# Altium PCB CSP_old.PcbDoc
Units mm, origin at the board's own origin, x right, y up, seen from the top; angles counter-clockwise.
Board outline 41.66 x 28.96 mm, 2 copper layers (Top Layer, Bottom Layer); 36 components, 22 nets, 80 pads, 0 vias.
Unrouted connection lines stored in the file: 1.
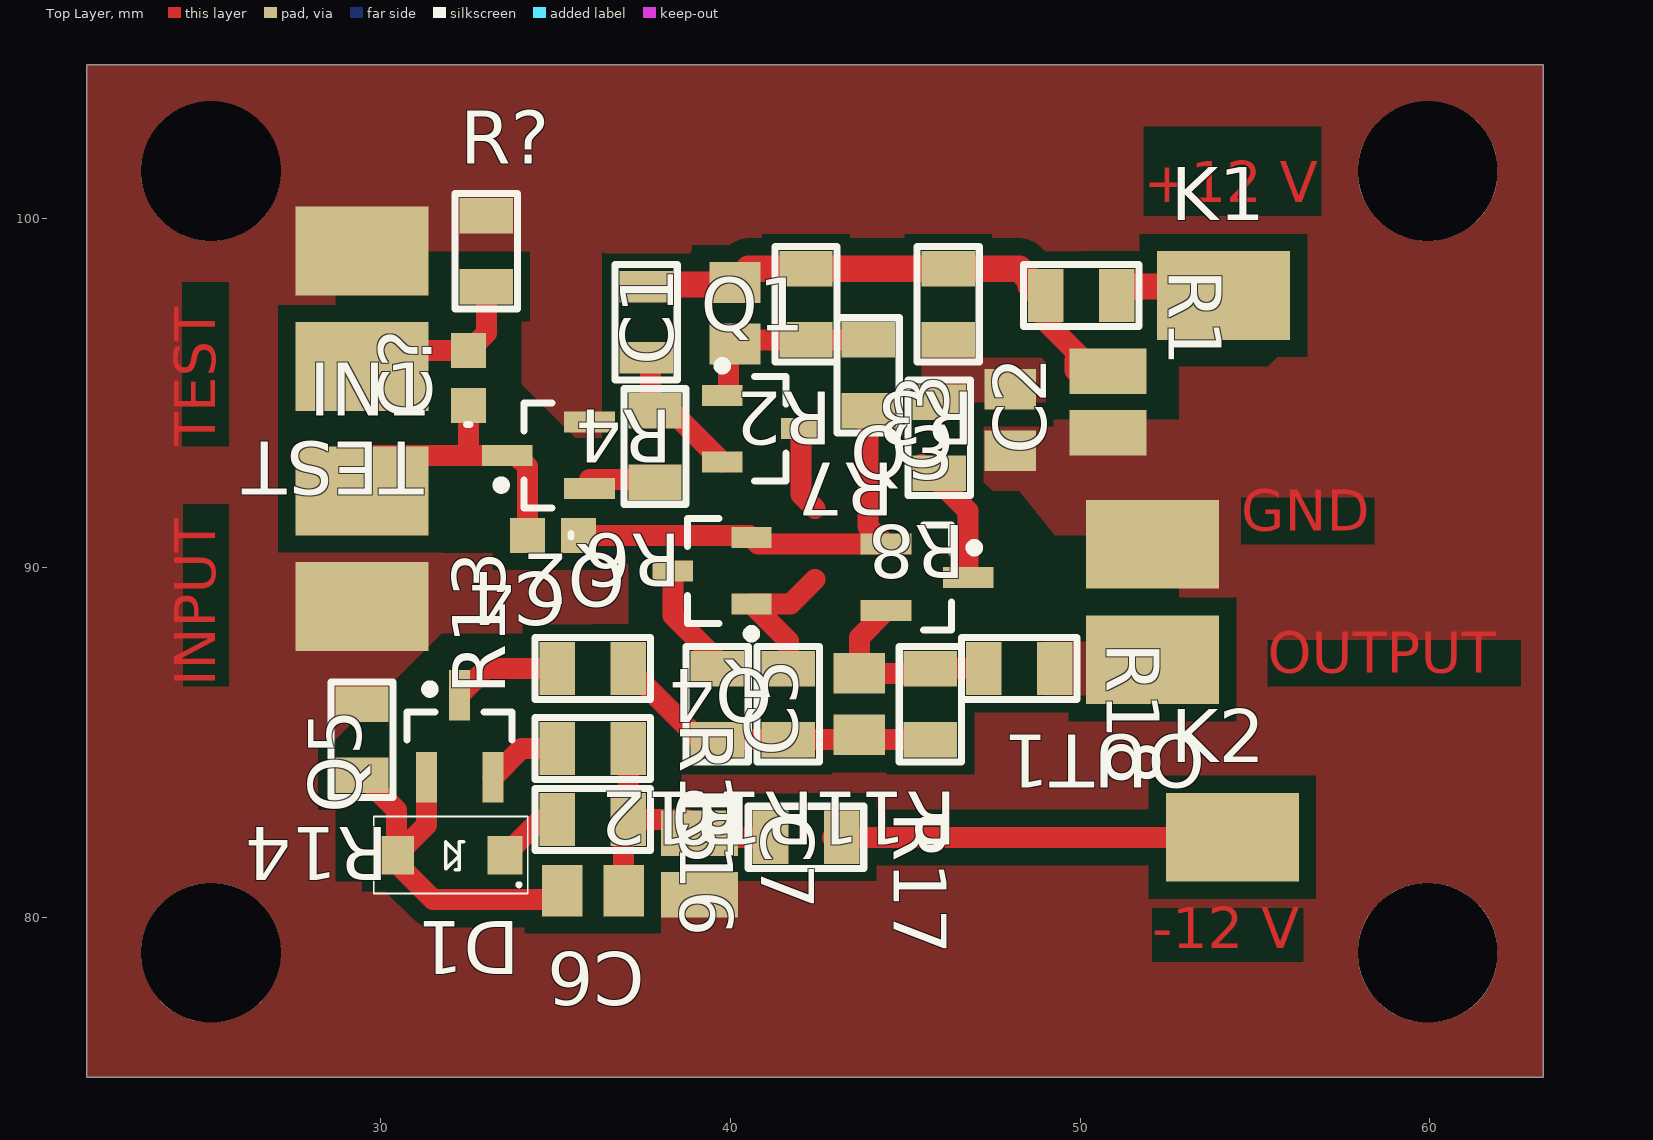
[diagram p0: Top Layer view]
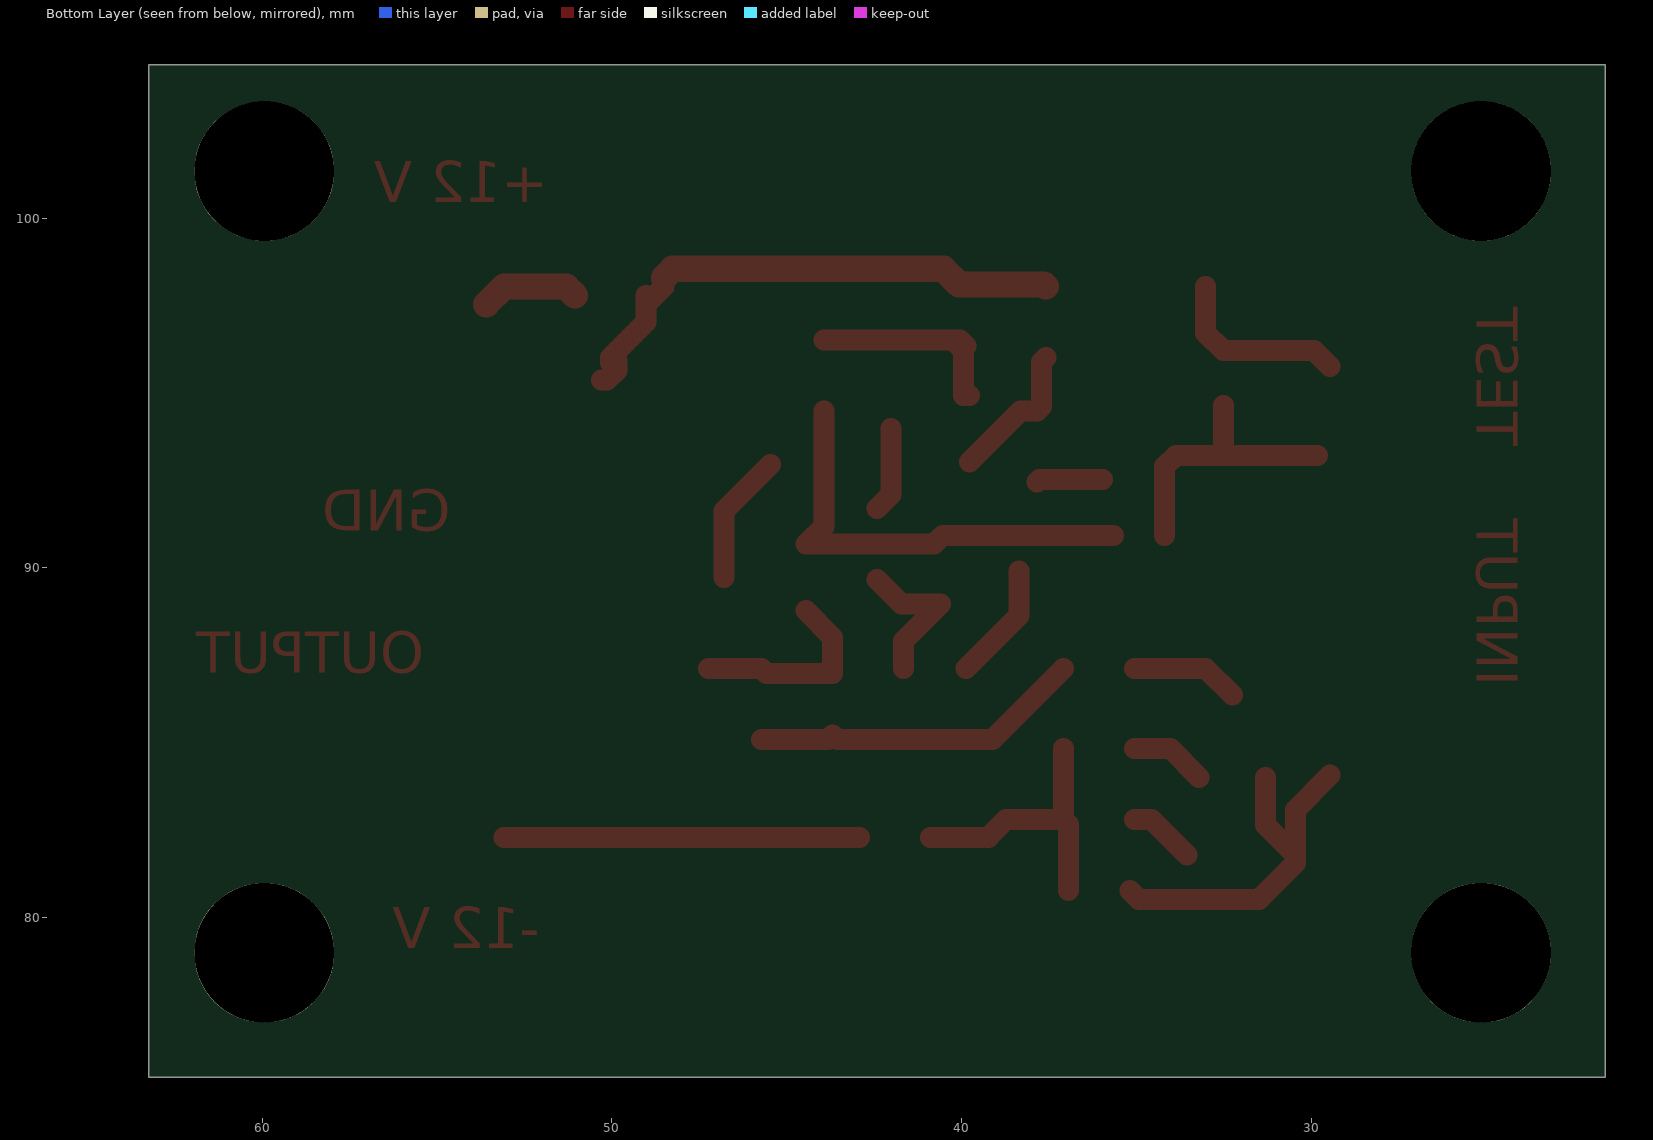
[diagram p1: Bottom Layer view, seen from below]
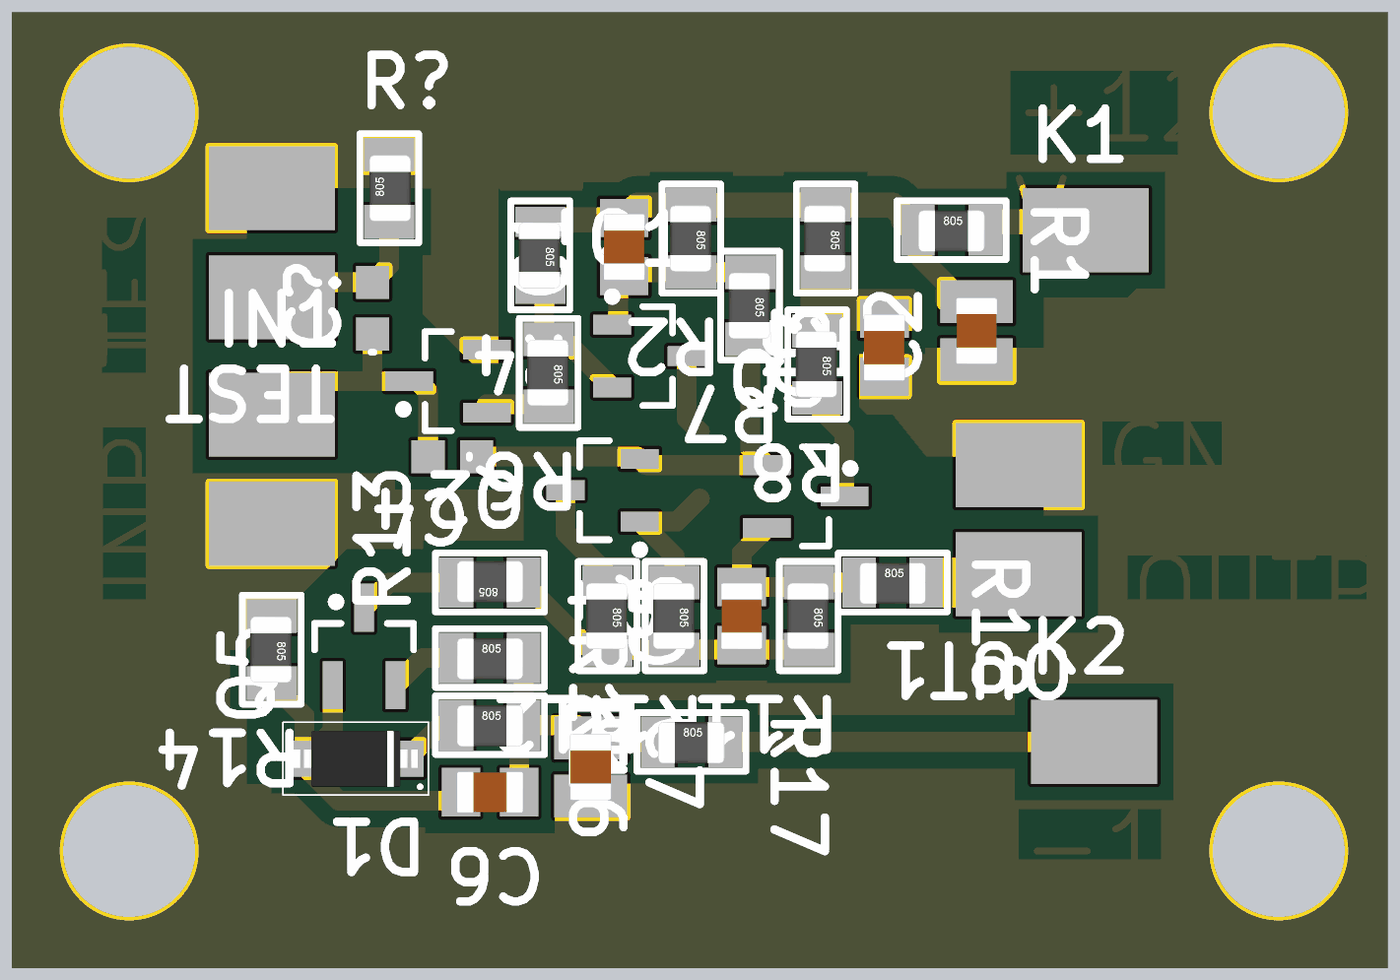
[diagram p2: 3D render of the assembled board from above, using the file's embedded part models]

## Layer stack, top to bottom
Top Solder: solder mask 0.0102, Solder Resist, Dk 3.5
Top Layer: signal copper 0.0356
Dielectric 1: dielectric 0.32, FR-4, Dk 4.8
Bottom Layer: signal copper 0.0356
Bottom Solder: solder mask 0.0102, Solder Resist, Dk 3.5

## Board outline
21.59,75.438 63.246,75.438 63.246,104.394 21.59,104.394

## Design rules (kind name [scope] priority, off if disabled: settings)
Clearance [All] p1: gap=0.254 ignorepadtopadclearanceinfootprint=FALSE except(0: Arc-Hole Track-Hole SMDPad-Hole THPad-Hole Via-Hole Fill-Hole Poly-Text Poly-Hole Region-Hole Text-Hole; 0.3: Arc-Arc Arc-Track Arc-SMDPad Arc-THPad Arc-Via Arc-Fill Arc-Poly Arc-Region Arc-Text Track-Track Track-SMDPad Track-THPad Track-Via Track-Fill Track-Region Track-Text; 0.5: Track-Poly SMDPad-Poly)
PlaneConnect [All] p1: planeconnectstyle=Direct reliefexpansion=0.508 reliefentries=4 reliefconductorwidth=0.254 reliefairgap=0.254
PolygonConnect [All] p1: connectstyle=Direct reliefconductorwidth=0.254 reliefentries=4 polygonreliefangle="90 Angle" airgapwidth=0.254
RoutingVias [All] p1: holewidth=0.711 width=1.27 viastyle="Through Hole" minholewidth=0.711 minwidth=1.27 maxholewidth=0.711 maxwidth=1.27
SolderMaskExpansion [All] p1: expansion=0.102 istentingtop=FALSE
Width [All] p1: maxlimit=1 minlimit=0.254 preferedwidth=0.6 toplayer_minwidth=0.5 bottomlayer_maxwidth=0.254 bottomlayer_prefwidth=0.254 minimp=50.000000 maximp=50.000000 favimp=50.000000
29 further rules are at their usual default settings.

## Components (designator, comment, footprint, x,y, rotation, side; value= is the part's Value field where it differs from the comment)
C1 "Cap" *CAPC2012X94N#1 40.132,97.282 r90 top value=1uF
C2 "Cap" *CAPC2012X94N#2 50.8,94.742 r90 top value=0.1uF
C3 "Cap" *CAPC2012X94N#1 48.006,94.234 r90 top value=0.1uF
C4 "Cap" 0603#1 34.544,90.932 r180 top value=0.3pF
C5 "Cap" *CAPC2012X94N#1 43.688,86.106 r90 top value=0.1uF
C6 "Cap" *CAPC2012X94N#1 36.068,80.772 r180 top value=0.01uF
C7 "Cap" *CAPC2012X94N#2 39.116,81.534 r270 top value=0.1uF
C? "Cap" 0603#2 32.512,94.996 r90 top value=0.3pF
D1 "Diode" SODFL350X110-2N 32.004,81.788 r180 top
IN1 "INPUT" IN/OUT 29.464,92.202 r0 top
K1 "+12V" PAD 54.102,97.79 r0 top
K2 "-12V" PAD 54.356,82.296 r0 top
OUT1 "OUTPUT" IN/OUT 52.07,87.376 r180 top
Q1 "PNP" SOT-23B_N 40.894,93.98 r0 top
Q2 "JFET-N" SOT23_M 34.798,93.218 r180 top
Q3 "2N3904 NPN" SOT23_M 45.625,89.728 r0 top
Q4 "2N3906 PNP" SOT-23B_N 39.479,89.916 r180 top
Q5 "2N3904 NPN" SOT23_M 32.258,85.185 r90 top
R1 "Res1" SMD-0805-RES#1 50.038,97.79 r270 top value=51
R2 "Res1" SMD-0805-RES#1 42.164,97.536 r180 top value=4.3K
R3 "Res1" SMD-0805-RES#1 46.228,97.536 r180 top value=33
R4 "Res1" SMD-0805-RES#2 37.592,97.028 r180 top value=820
R6 "Res1" SMD-0805-RES#1 37.846,93.472 r180 top value=33
R7 "Res1" SMD-0805-RES#1 43.942,95.504 r180 top value=3K
R8 "Res1" SMD-0805-RES#1 45.974,93.726 r180 top value=33
R10 "Res1" SMD-0805-RES#1 41.656,86.106 r180 top value=15k
R11 "Res1" SMD-0805-RES#1 45.72,86.106 r180 top value=500
R12 "Res1" SMD-0805-RES#1 39.624,86.106 r180 top value=33
R13 "Res1" SMD-0805-RES#1 36.068,87.122 r90 top value=33
R14 "Res1" SMD-0805-RES#1 29.464,85.09 r180 top value=10K
R15 "Res1" SMD-0805-RES#1 36.068,84.836 r270 top value=100
R16 "Res1" SMD-0805-RES#1 36.068,82.804 r270 top value=1.4k
R17 "Res1" SMD-0805-RES#1 42.164,82.296 r270 top value=51
R18 "Res1" SMD-0805-RES#1 48.26,87.122 r270 top value=51
R? "Res1" SMD-0805-RES#1 33.02,99.06 r0 top value=820
TEST "INPUT" IN/OUT 29.464,95.758 r180 top

## Footprints (in the part's own frame and the unit in brackets; to place one, negate y for a bottom-side part, rotate by r counter-clockwise, add the part's x,y. Pads: shape width x height; smd on the part's side, far side on the other; paste and mask are expansions set on the pad)
0603#1 [mm] "Chip Inductor, Body 0.6x0.3mm, IPC High Density"
  rect 1x1 smd: 1(-1.112,0) 2(0.35,0)
  silkscreen extent -0.9,-0.05 -0.9,0.05, body extent -0.33,-0.18 0.33,0.18, height 0.55
0603#2 [mm] "Chip Inductor, Body 0.6x0.3mm, IPC High Density"
  rect 1x1 smd: 1(-0.35,0) 2(1.218,0)
  silkscreen extent -0.9,-0.05 -0.9,0.05, body extent -0.33,-0.18 0.33,0.18, height 0.55
*CAPC2012X94N#1 [mm]
  rect 1.16x1.47 smd: 1(-0.88,0) 2(0.88,0)
  body extent -1,-0.62 1.01,0.63, height 0.94
*CAPC2012X94N#2 [mm]
  rect 1.3x2.2 smd: 1(-0.88,0) 2(0.88,0)
  body extent -1,-0.62 1.01,0.63, height 0.94
IN/OUT [mil]
  rect 150x100 smd: 1(0,0) 2(0,-130)
PAD [mm]
  rect 3.81x2.54 smd: 1(0,0)
SMD-0805-RES#1 [mil]
  rect 60x40 smd: 1(0,40) 2(0,-40)
  silkscreen extent -35,-65 35,65, body extent -24,-39 26,39, height 31
SMD-0805-RES#2 [mil]
  rect 60x35.43 smd: 1(0,40) 2(0,-40)
  silkscreen extent -35,-65 35,65, body extent -24,-39 26,39, height 31
SODFL350X110-2N [mm] "SODFL, 2-Leads, Body 1.70x3.50mm, IPC Medium Density"
  rect 1x1.1 smd: A(1.55,0) C(-1.55,0)
  silkscreen extent -2.2,-1.1 2.2,1.1, body extent -1.87,-0.85 1.88,0.85, height 1.2
SOT23_M [mm] "SOT23, 3-Leads, Body 2.9x1.3mm, Pitch 0.95mm, Lead Span 2.3mm - Reverse Pinning, IPC Low Density"
  rect 1.45x0.6 smd: 1(1.175,0) 2(-1.175,-0.95) 3(-1.175,0.95)
  silkscreen extent -0.1,-1.5 1.47,1.5, body extent -0.7,-1.5 0.7,1.5, height 1.1
SOT-23B_N [mm] "SOT23, 3-Leads, Body 2.9x1.3mm, Pitch 0.95mm, Lead Span 2.4mm, IPC Medium Density"
  rect 1.15x0.6 smd: 1(-1.125,0.95) 2(-1.125,-0.95) 3(1.125,0)
  silkscreen extent -1.25,-1.5 0.7,1.92, body extent -0.7,-1.5 0.7,1.5, height 1.14

## Part data
C1 C2 C3 C4 C5 C6 C7 C?: "Capacitor", LatestRevisionDate=17-Jul-2002, LatestRevisionNote="Re-released for DXP Platform.", PackageDescription="Radial Cap, Thru-Hole; 2 Leads; 0.3 in Pin Spacing", PackageReference=RAD-0.3, Published=8-Jun-2000, Publisher="Altium Limited"
Q1: "PNP Bipolar Transistor", LatestRevisionDate=29-May-2009, LatestRevisionNote="IPC-7351 Footprint Added.", PackageDescription="3-Pin SOT-23 Package 0.95 mm Pitch, 2.4 mm Lead Span", PackageReference=SOT-23B, PackageVersion=Aug-1999, Published=8-Jun-2000, Publisher="Altium Limited"
Q2: "N-Channel JFET", Code_JEDEC=TO-254-AA, LatestRevisionDate=17-Jul-2002, LatestRevisionNote="Re-released for DXP Platform.", PackageReference=TO-254-AA, Published=8-Jun-2000, Publisher="Altium Limited"
Q3 Q5: library part NPN, "NPN Bipolar Transistor", Code_JEDEC=TO-226-AA, LatestRevisionDate=17-Jul-2002, LatestRevisionNote="Re-released for DXP Platform.", PackageDescription="TO, Flat Index; 3 In-Line, Axial Leads; Body Dia. 4.8mm; Leads 0.55 x 0.51 mm (max)", PackageReference=TO-226-AA, Published=8-Jun-2000, Publisher="Altium Limited"
Q4: library part PNP, "PNP Bipolar Transistor", LatestRevisionDate=29-May-2009, LatestRevisionNote="IPC-7351 Footprint Added.", PackageDescription="3-Pin SOT-23 Package 0.95 mm Pitch, 2.4 mm Lead Span", PackageReference=SOT-23B, PackageVersion=Aug-1999, Published=8-Jun-2000, Publisher="Altium Limited"
R1 R2 R3 R4 R6 R7 R8 R10 R11 R12 R13 R14 R15 R16 R17 R18 R?: "Resistor", LatestRevisionDate=17-Jul-2002, LatestRevisionNote="Re-released for DXP Platform.", PackageDescription="Axial Device, Thru-Hole; 2 Leads; 0.3 in Pin Spacing", PackageReference=AXIAL-0.3, Published=8-Jun-2000, Publisher="Altium Limited"

## Free pads (board coordinates)
  round 4 hole 4: 0(25.146,78.994) 0(25.146,101.346) 0(59.944,78.994) 0(59.944,101.346)
  round 0 smd: 4(65.024,100.838)

## Nets (pads, with @x,y where several pads share a name; then routed paths per layer and width w, separated by ;. In a path a pad name is that pad's centre, name@x,y a point inside that pad or via, vN(x,y) a via of type N, cw(c..) or ccw(c..) an arc to the next point about the centre after c; other vN are vias at no path point)
GND: C2.1 C3.1 C7.2 IN1.2 OUT1.2 pad.0@25.146,78.994 pad.0@59.944,78.994 pad.0@59.944,101.346 Q2.2 R14.2 R?.1 TEST.2
NetC1_1: C1.1 Q1.1 R2.1 R7.2 | length 5.9
  Top Layer w0.6: Q1.1 39.951,94.93 39.951,96.221 C1.1 ; C1.1@39.869,96.341 40.048,96.52 R2.1 R7.2
NetC1_2: C1.2 C2.2 R1.2 R2.2 R3.2 R4.2 | length 15.5
  Top Layer w0.6: R1.2@48.514,98.298 48.514,98.044 R1.2@49.022,97.536 ; R1.2 49.022,97.028 50.038,96.012 C2.2@50.038,95.876 ; C2.2@49.857,95.939 49.857,95.648 50.137,95.368 C2.2@50.292,95.368
  Top Layer w0.75: R4.2 37.651,98.103 C1.2@40.073,98.103 ; C1.2 C1.2@40.073,98.103 ; R1.2@48.514,98.298 48.26,98.552 R3.2 44.196,98.552 R2.2 40.522,98.552 C1.2@40.073,98.103
NetC3_2: C3.2 R3.1 R8.2
NetC4_1: C4.1 Q3.3 Q4.2 R7.1 | length 12.9
  Top Layer w0.6: C4.1 40.538,90.932 Q4.2 40.792,90.678 Q3.3 43.942,91.186 R7.1
NetC4_2: C4.2 C?.1 IN1.1 Q2.1 | length 7.9
  Top Layer w0.6: IN1.1@29.824,93.218 32.512,93.218 ; C?.1 32.512,93.218 ; C4.2 34.194,92.901 33.877,93.218 Q2.1 32.512,93.218
NetC5_1: C5.1 R10.1 R11.1 R12.1 R13.2 | length 9.6
  Top Layer w0.6: R13.2 39.116,85.09 R12.1 R10.1 43.552,85.09 C5.1 43.824,85.09 R11.1
NetC5_2: C5.2 Q3.2 R11.2 R18.2 | length 5.7
  Top Layer w0.6: Q3.2 43.688,88.016 C5.2 45.584,86.986 R11.2 R18.2
NetC6_1: C6.1 C7.1 R15.1 R16.1 R17.2 | length 8.1
  Top Layer w0.6: C6.1 36.948,82.668 R16.1 ; R15.1 R16.1 ; R17.2@40.894,82.296 39.234,82.296 C7.1 38.726,82.804 R16.1
NetC6_2: C6.2 D1.A Q5.3 R14.1 | length 10.8
  Top Layer w0.6: R14.1 30.454,83.084 D1.A ; Q5.3 31.308,82.642 D1.A ; C6.2 34.934,80.518 31.496,80.518 30.454,81.56 D1.A
NetC?_2: C?.2 R?.2 TEST.1 | length 5.3
  Top Layer w0.6: TEST.1 29.92,96.214 C?.2 33.02,96.722 R?.2
NetD1_C: D1.C R16.2 | length 1.9
  Top Layer w0.6: D1.C 34.57,82.804 R16.2
NetK1_1: K1.1 R1.1 | length 2.9
  Top Layer w0.75: R1.1 51.308,98.044 53.086,98.044 K1.1@53.594,97.536
NetK2_1: K2.1 R17.1 | length 10.2
  Top Layer w0.6: R17.1@42.926,82.296 K2.1@53.086,82.296
NetOUT1_1: OUT1.1 R18.1
NetQ1_2: Q1.2 R4.1 R6.2 | length 4.2
  Top Layer w0.6: R4.1 37.719,95.885 37.719,94.615 R6.2 38.311,94.488 Q1.2
NetQ1_3: Q1.3 Q4.1 R10.2 | length 6.8
  Top Layer w0.6: R10.2 41.656,87.914 Q4.1 41.722,88.966 42.418,89.662 ; Q1.3 42.019,92.093 42.418,91.694
NetQ2_3: Q2.3 R6.1 | length 1.9
  Top Layer w0.6: Q2.3@35.973,92.522 37.78,92.522 R6.1
NetQ3_1: Q3.1 R8.1 | length 3.8
  Top Layer w0.6: R8.1@45.466,92.964 46.8,91.63 Q3.1
NetQ4_3: Q4.3 R12.2 | length 3.4
  Top Layer w0.6: Q4.3 38.354,88.646 R12.2@39.878,87.122
NetQ5_1: Q5.1 R13.1 | length 3.1
  Top Layer w0.6: Q5.1 33.02,87.122 R13.1
NetQ5_2: Q5.2 R15.2 | length 2.2
  Top Layer w0.6: Q5.2 34.034,84.836 R15.2

## Polygon pours and split planes (outlines as drawn)
GND on Top Layer "GND_L01_P009" (solid, pour order 9): 28.702,92.202 28.702,99.06 36.322,99.06 36.83,98.552 56.134,98.552 56.134,96.52 55.372,95.758 52.832,95.758 52.832,89.154 54.356,89.154 54.356,85.852 38.608,85.852 38.608,81.026 28.702,81.026 28.702,85.09 31.75,88.138 31.75,92.202 21.59,92.202 21.59,75.438 63.246,75.438 63.246,104.394 21.59,104.394 21.59,92.202
GND on Top Layer "GND" (solid, pour order 11): 31.75,90.432 31.758,90.424 37.084,90.424 37.084,88.138 31.242,88.138 31.242,90.424
GND on Top Layer "GND" (solid, pour order 10): 34.036,99.314 34.036,95.25 35.56,93.726 36.322,93.726 36.322,99.314
no net on Top Layer "NONET_L01_P008" (solid, pour order 8): 25.908,101.346
NetOUT1_1 on Top Layer "NETOUT1_1_L01_P002" (solid, pour order 2): 49.022,87.884 49.022,86.36 51.308,86.36 51.308,87.884
NetC3_2 on Top Layer "NETC3_2_L01_P004" (solid, pour order 4): 45.466,97.028 45.466,95.504 45.466,94.488 46.482,94.488 46.482,94.742 49.022,94.742 49.022,96.012 46.99,96.012 46.99,97.028
no net on Top Layer "NONET_L01_P003" (solid, pour order 3): 55.88,85.852
GND on Top Layer "GND_L01_P001" (solid, pour order 1): 47.244,94.234 47.244,92.456 47.498,92.202 48.26,92.202 49.276,90.932 53.086,90.932 53.086,94.234
no net on Top Layer "NONET_L01_P000" (solid, pour order 0): 47.244,93.98

## Other copper
Top Layer:
  text "+12 V" at 51.816,100.076 h2
  text "TEST" at 25.654,93.472 h2 r90
  text "GND" at 54.61,90.678 h2
  text "INPUT" at 25.654,86.614 h2 r90
  text "OUTPUT" at 55.372,86.614 h2
  text "-12 V" at 52.07,78.74 h2